# Altium PCB Weerstation.PcbDoc
Units mm, origin at the board's own origin, x right, y up, seen from the top; angles counter-clockwise.
Board outline 80 x 80 mm, 2 copper layers (Top Layer, Bottom Layer); 50 components, 49 nets, 214 pads, 112 vias.
Unrouted connection lines stored in the file: 2.
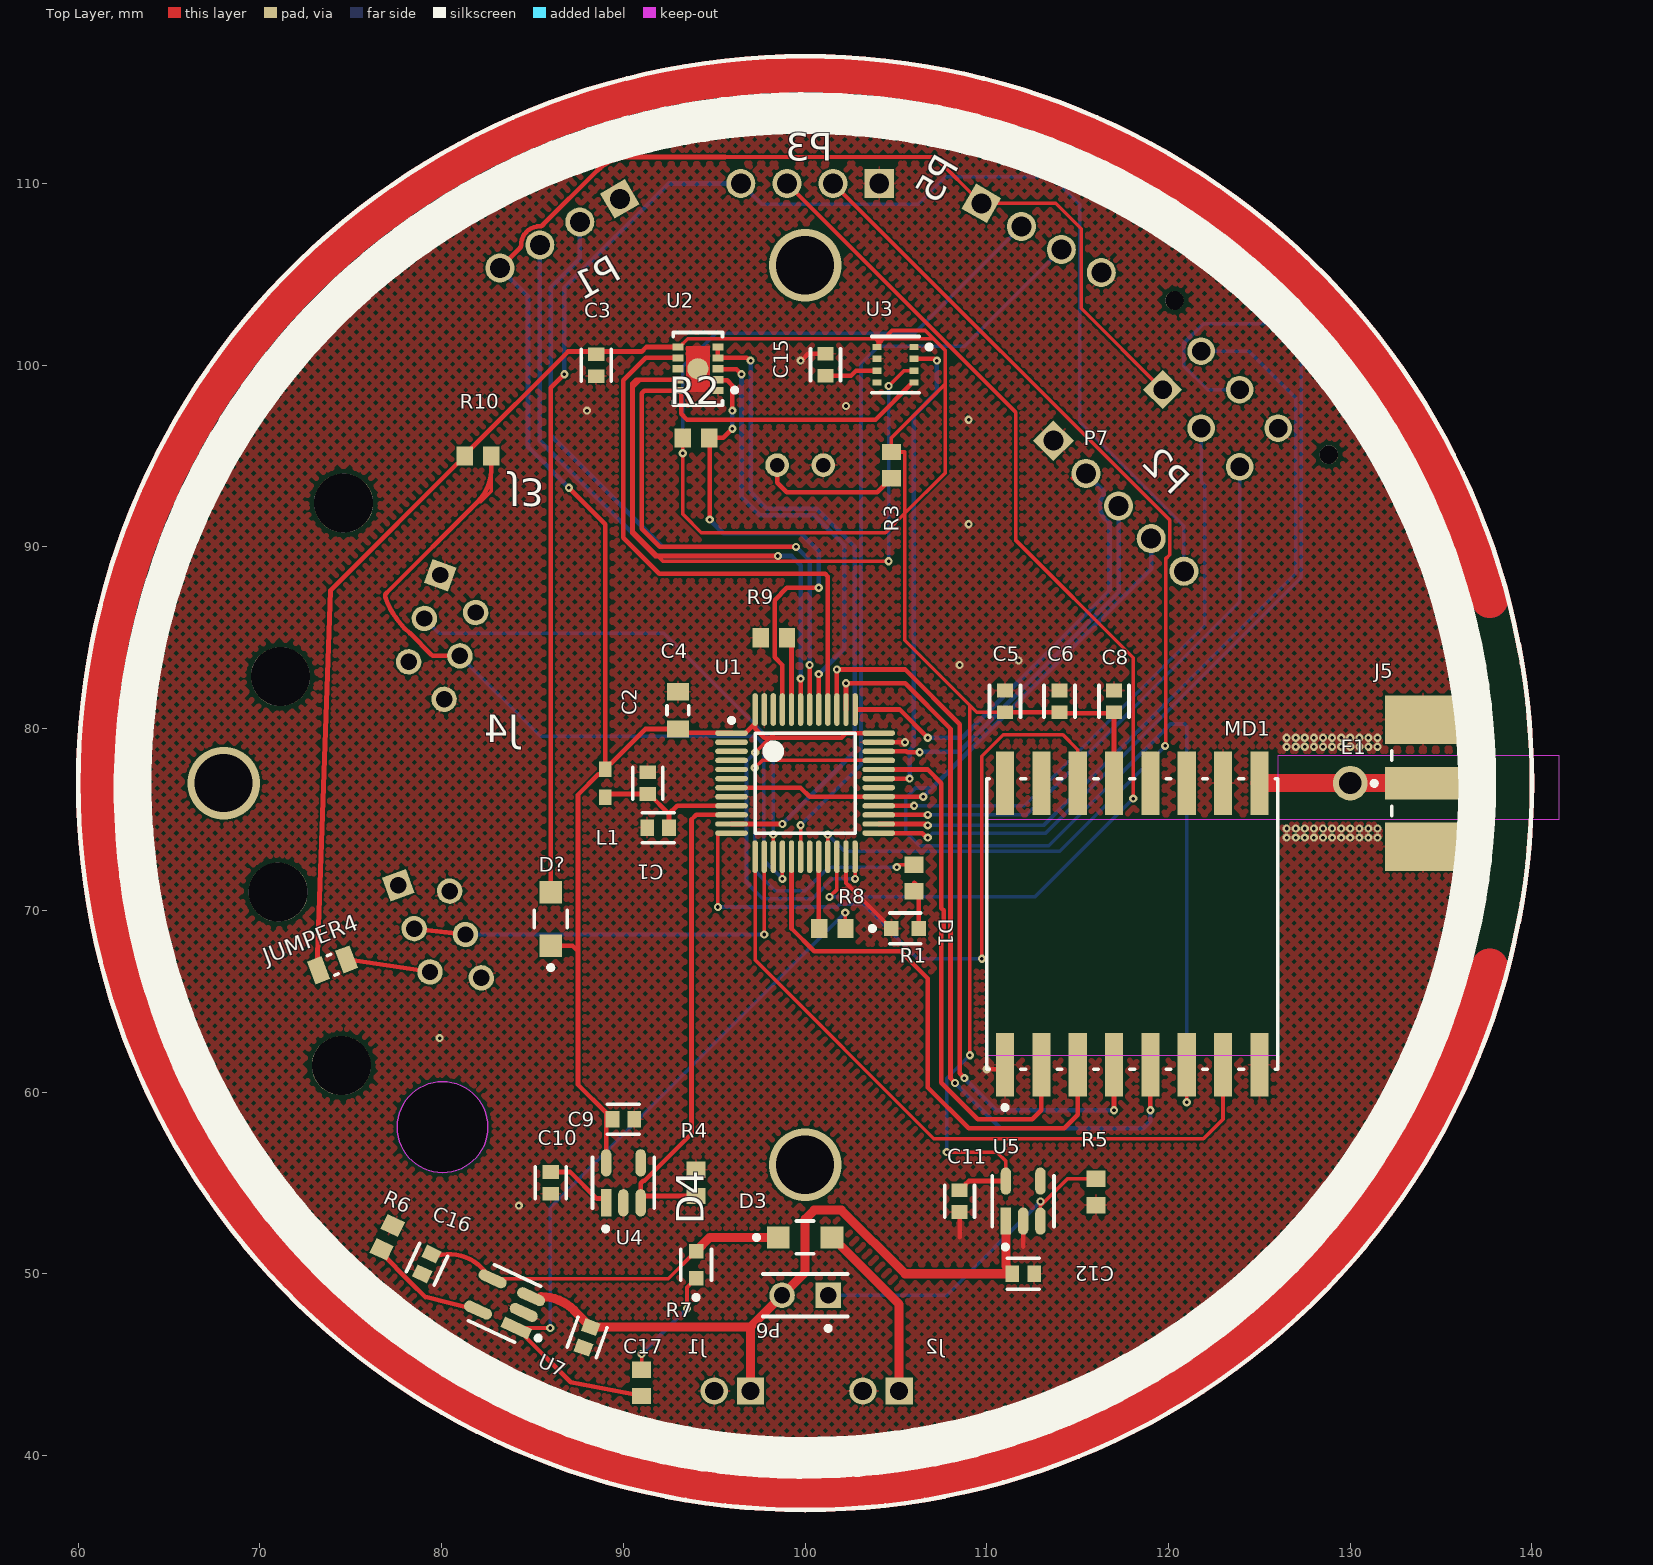
[diagram p0: Top Layer view]
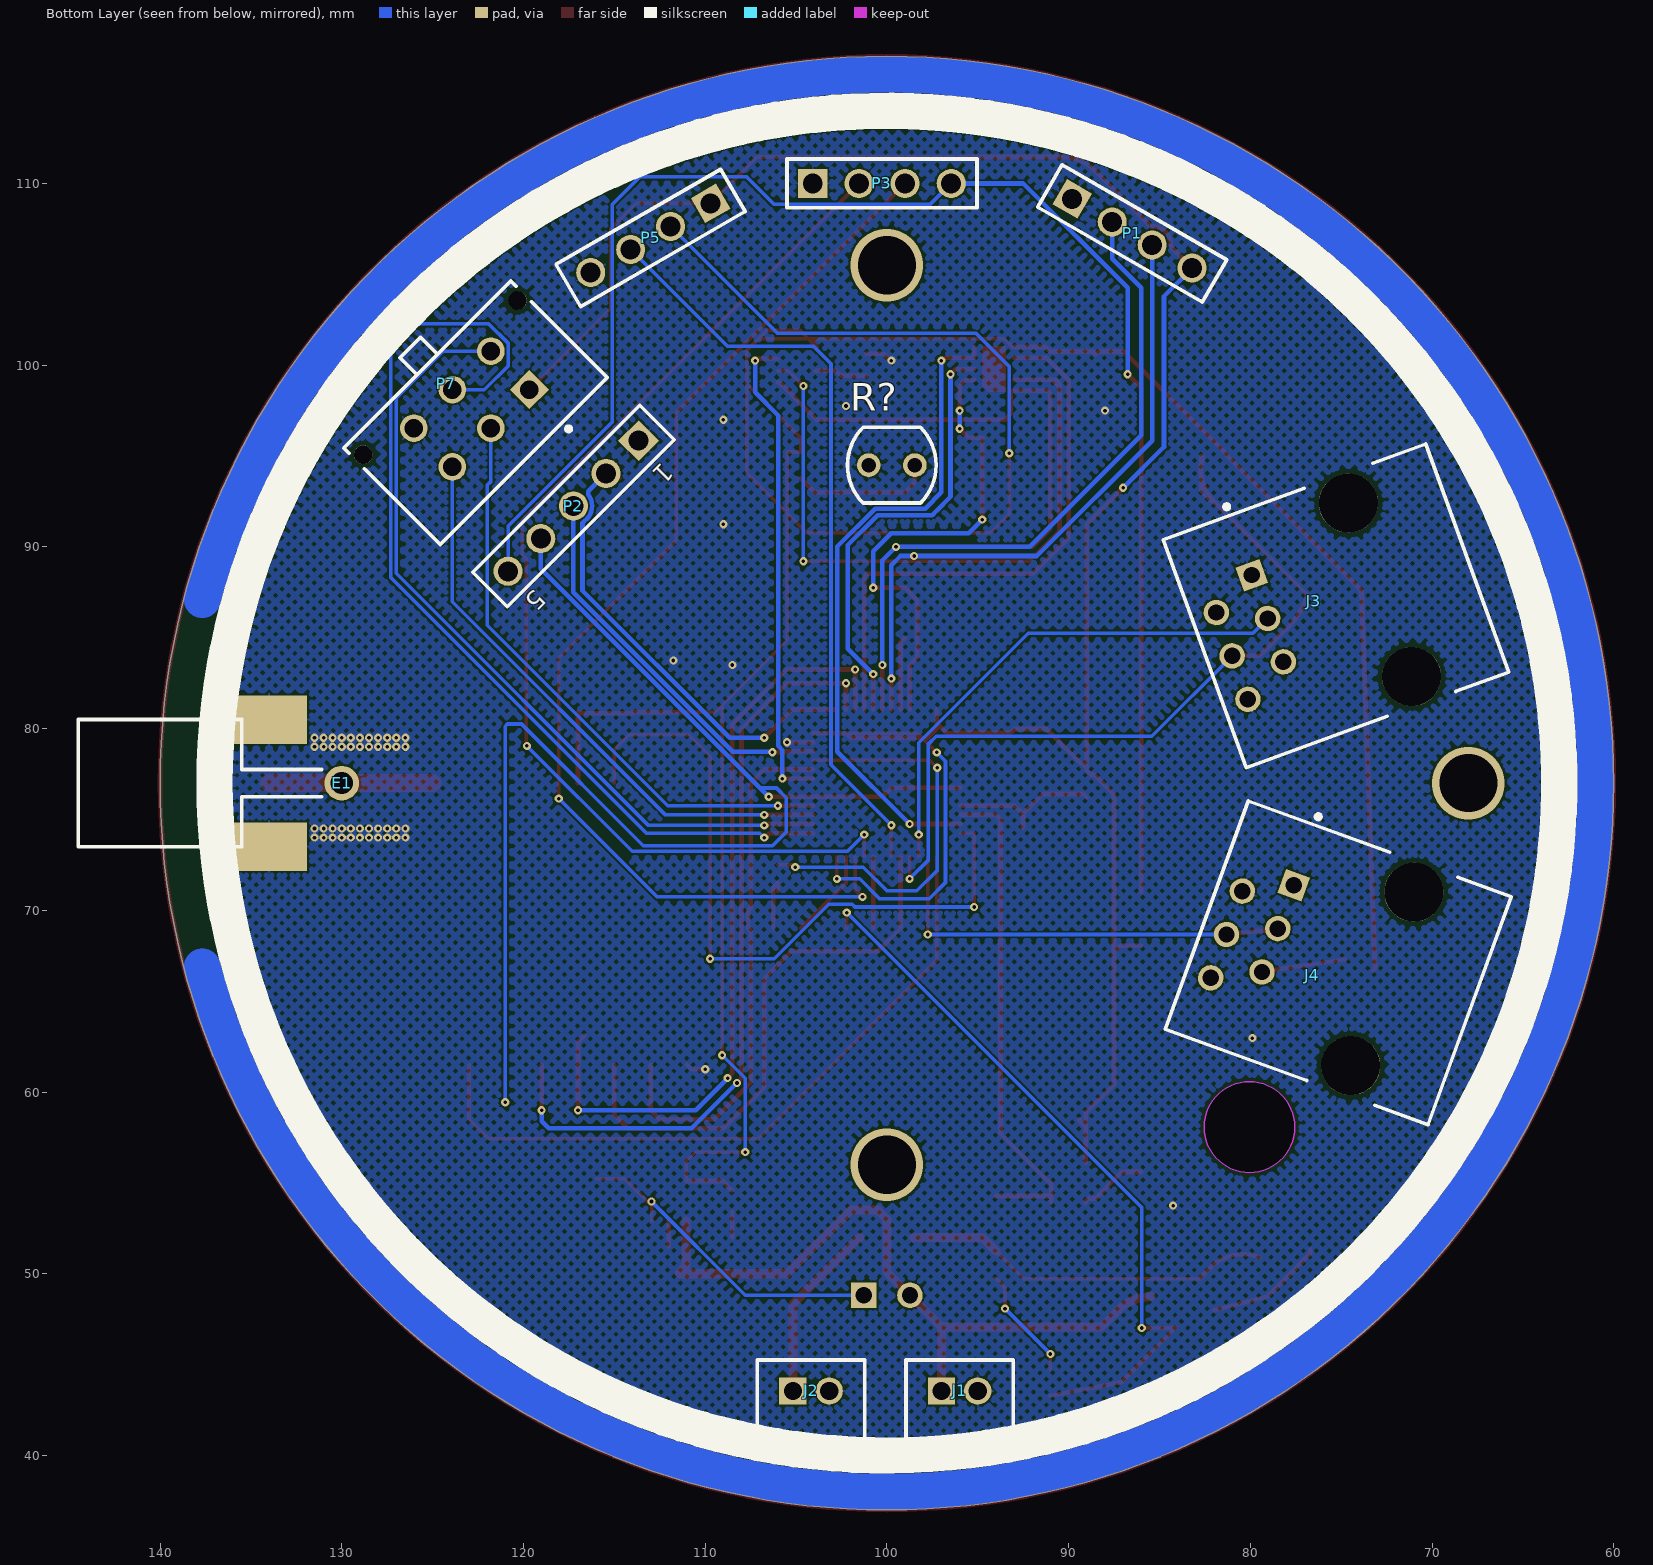
[diagram p1: Bottom Layer view, seen from below]
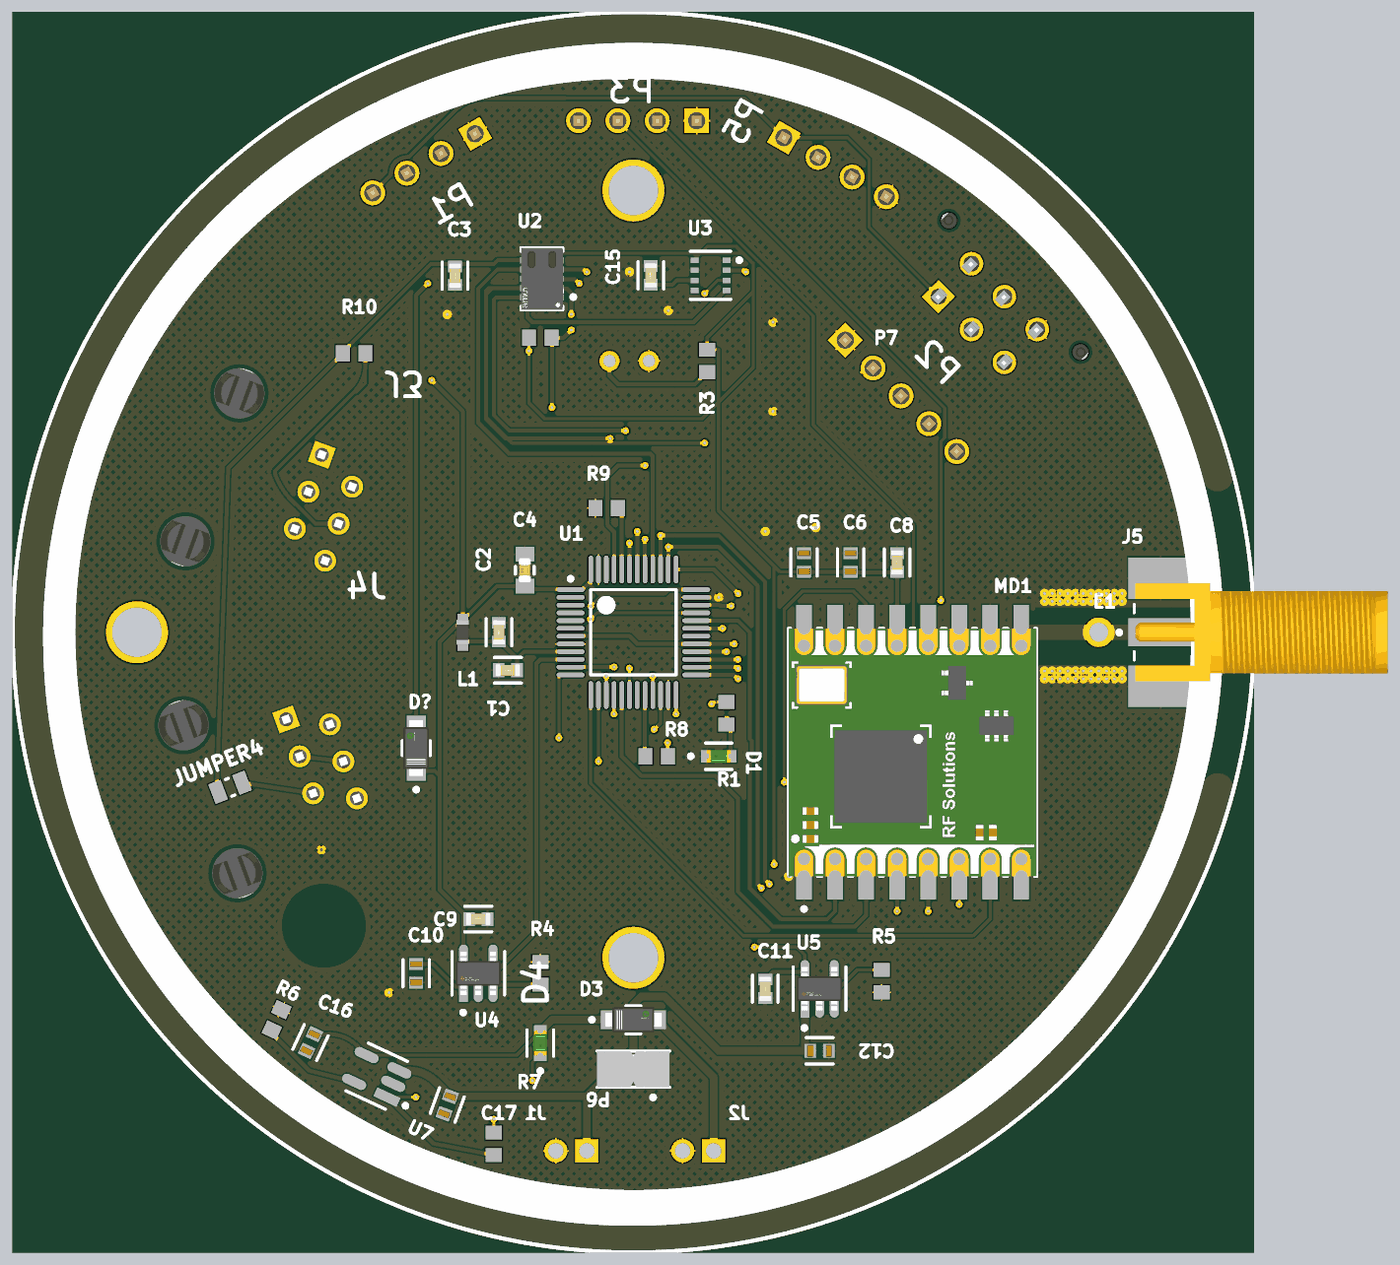
[diagram p2: 3D render of the assembled board from above, using the file's embedded part models]
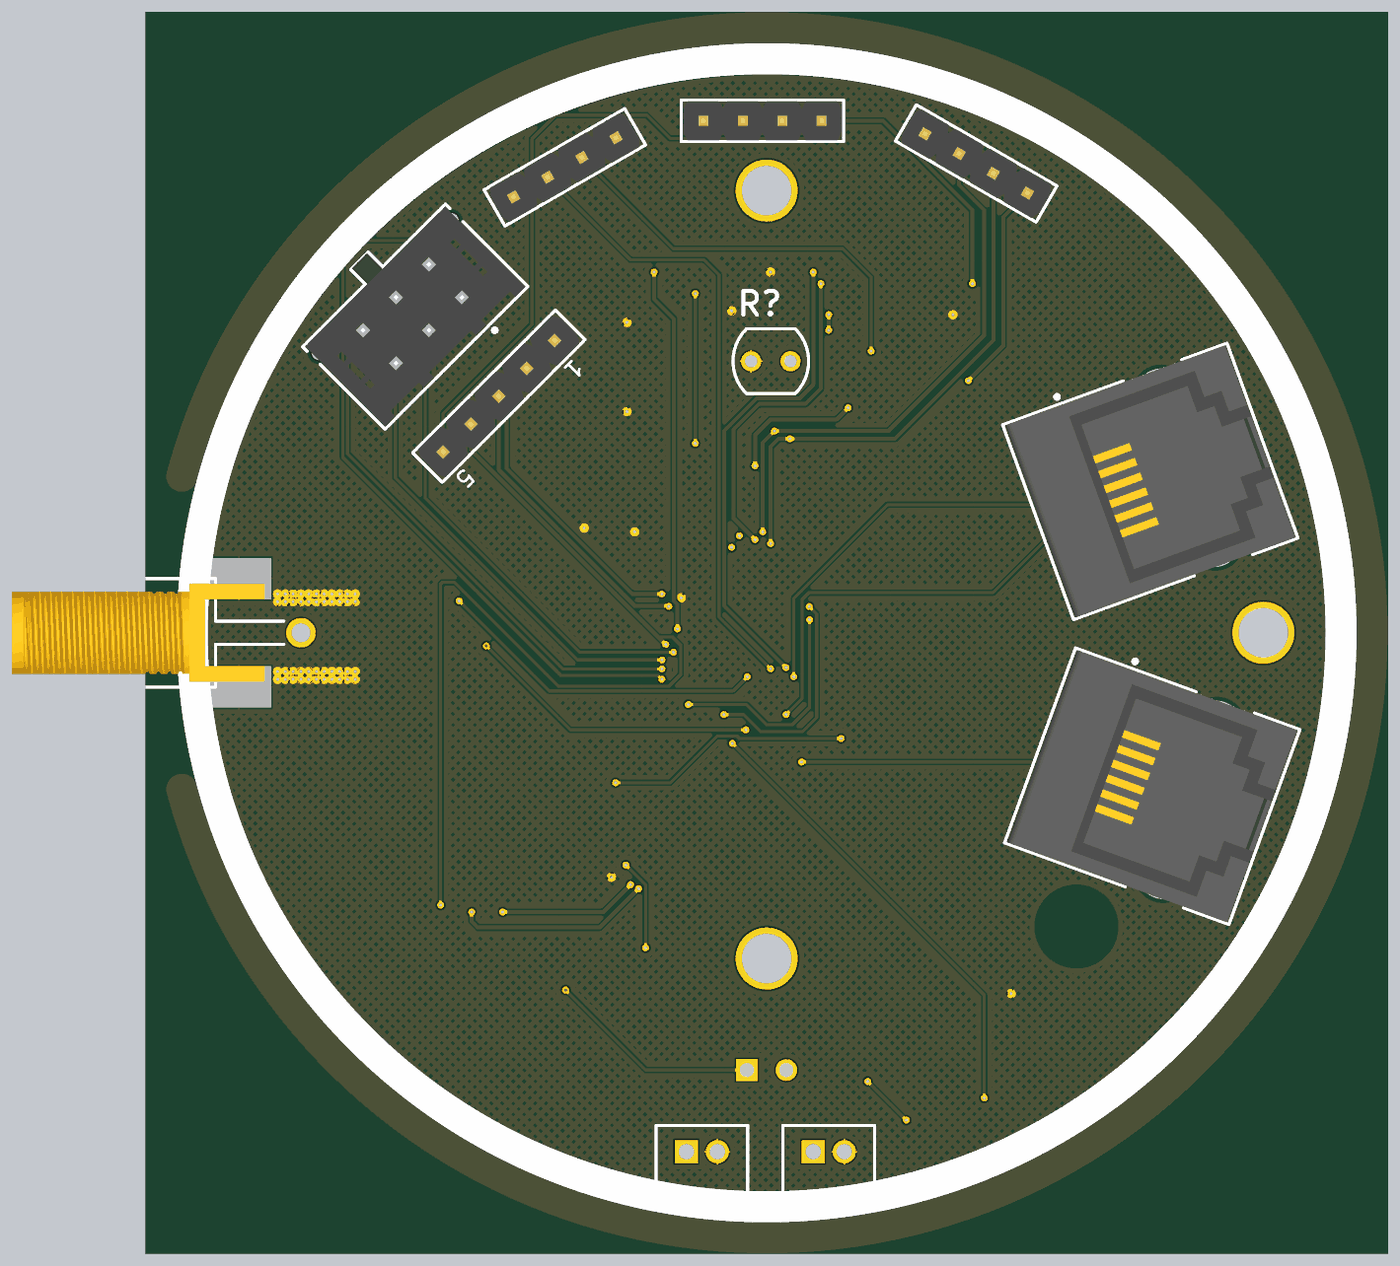
[diagram p3: 3D render of the assembled board from below, using the file's embedded part models]

## Layer stack, top to bottom
Top Solder: solder mask 0.0102, Solder Resist, Dk 3.5
Top Layer: signal copper 0.0356
Dielectric 1: dielectric 0.32, FR-4, Dk 4.8
Bottom Layer: signal copper 0.0356
Bottom Solder: solder mask 0.0102, Solder Resist, Dk 3.5

## Board outline
60,77 ccw(c100,77) 100,37 ccw(c100,77) 140,77 ccw(c100,77) 100,117 ccw(c100,77)
cut-out: 77.546,58.068 cw(c80.046,58.068) 80.046,60.568 cw(c80.046,58.068) 82.546,58.068 cw(c80.046,58.068) 80.046,55.568 cw(c80.046,58.068)
cut-out: 77.546,58.068 ccw(c80.046,58.068) 80.046,55.568 ccw(c80.046,58.068) 82.546,58.068 ccw(c80.046,58.068) 80.046,60.568 ccw(c80.046,58.068)

## Design rules (kind name [scope] priority, off if disabled: settings)
BoardOutlineClearance [All] p1: gap=0.2 ignorepadtopadclearanceinfootprint=FALSE
Clearance [All] p1: gap=0.102 ignorepadtopadclearanceinfootprint=FALSE except(0.127: Arc-Via Track-Via SMDPad-Via THPad-Via Via-Via Via-Fill Via-Poly Via-Region Via-Text; 0.25: Arc-Hole Track-Hole SMDPad-Hole THPad-Hole Via-Hole Fill-Hole Poly-Hole Region-Hole Text-Hole)
ComponentClearance [All] p1: gap=0.102 collisioncheckmode=3 verticalgap=0.102 showdistances=TRUE
DiffPairsRouting [All] p1: maxlimit=0.102 minlimit=0.102 mostfreqgap=0.102 toplayer_minwidth=0.102 toplayer_maxwidth=1816.048 toplayer_prefwidth=0.102 bottomlayer_minwidth=0.102 bottomlayer_maxwidth=1816.048 bottomlayer_prefwidth=0.102 maxuncoupledlength=12.7
Height [All] p1: minheight=0 maxheight=1816.048 prefheight=12.7
HoleSize [All] p1: absolutevalues=TRUE maxlimit=6.3 minlimit=0.2 maxpercent=80.000 minpercent=20.000
HoleToHoleClearance [All] p1: gap=0.25 allowstackedmicrovias=FALSE
MinimumAnnularRing [All] p1: minimumring=0.076
MinimumSolderMaskSliver [All] p1: minsoldermaskwidth=0
PlaneClearance [All] p1: clearance=0.102
PlaneConnect PlaneConnectPowerPads [InPadClass('PowerPads')] p1: planeconnectstyle=Direct reliefexpansion=0.508 reliefentries=4 reliefconductorwidth=0.254 reliefairgap=0.254
PlaneConnect [All] p2: pad.planeconnectstyle=Relief pad.reliefexpansion=0.3 pad.reliefentries=4 pad.reliefconductorwidth=0.102 pad.reliefairgap=0.102 via.planeconnectstyle=Direct via.reliefexpansion=0.3 via.reliefentries=4 via.reliefconductorwidth=0.127 via.reliefairgap=0.127
PolygonConnect PolygonConnectPowerPads [All vs (InPadClass('PowerPads'))] p1: connectstyle=Direct reliefconductorwidth=0.254 reliefentries=4 polygonreliefangle="90 Angle" airgapwidth=0.254
PolygonConnect [All] p2: thpad.connectstyle=Relief thpad.reliefconductorwidth=0.102 thpad.reliefentries=4 thpad.polygonreliefangle="90 Angle" thpad.airgapwidth=0.102 smdpad.connectstyle=Relief smdpad.reliefconductorwidth=0.102 smdpad.reliefentries=4 smdpad.polygonreliefangle="90 Angle" smdpad.airgapwidth=0.102 via.connectstyle=Direct via.reliefconductorwidth=0.127 via.reliefentries=4 via.polygonreliefangle="90 Angle" via.airgapwidth=0.127
RoutingVias [All] p1: holewidth=0.2 width=0.45 viastyle="Through Hole" minholewidth=0.2 minwidth=0.45 maxholewidth=6.3 maxwidth=6.55
SilkToSilkClearance [All] p1: silktosilkclearance=0
SilkToSolderMaskClearance [IsPad] p1: minsilkscreentomaskgap=0.102 clearancetoexposedcopper=TRUE
SolderMaskExpansion [All] p1: expansion=0.075
Width [All] p1: maxlimit=0.254 minlimit=0.102 preferedwidth=0.2 minimp=50.000000 maximp=50.000000 favimp=50.000000
20 further rules are at their usual default settings.

## Components (designator, comment, footprint, x,y, rotation, side; value= is the part's Value field where it differs from the comment)
C1 "100nF" FP-C0603C105K3PACTU-MFG 91.907,74.55 r180 top
C2 "100nF" FP-C0603C105K3PACTU-MFG 91.335,77 r90 top
C3 "100nF" FP-C0603C105K3PACTU-MFG 88.5,100 r270 top
C4 "100nF" FP-CGA3E-0_3-0_1-IPC_A 93,81 r90 top
C5 "4.7uF" FP-C0603-CG-MFG 111,81.5 r90 top
C6 "4.7uF" FP-C0603-CG-MFG 114,81.5 r90 top
C8 "100nF" FP-C0603C105K3PACTU-MFG 117,81.5 r90 top
C9 "1uF" FP-C0603C105K3PACTU-MFG 90,58.5 r0 top
C10 "1uF" FP-C0603-CG-MFG 86,55 r270 top value=4.7uF
C11 "1uF" FP-C0603C105K3PACTU-MFG 108.5,54 r270 top
C12 "1uF" FP-C0603-CG-MFG 112,50 r0 top value=4.7uF
C15 "100nF" FP-C0603C105K3PACTU-MFG 101.125,100.025 r90 top
C16 "4.7uF" FP-C0603-CG-MFG 79.186,50.535 r245 top
C17 "4.7uF" FP-C0603-CG-MFG 88,46.5 r250 top
D1 "Green LED" FP-LTST-C190GKT-MFG 105.5,69 r0 top
D3 "MBR120VLSFT3G" FP-498-MFG 100,52 r0 top
D4 "Green LED" FP-LTST-C190GKT-MFG 94,50.5 r90 top
D? "MBR120VLSFT3G" FP-498-MFG 86,69.525 r90 top
E1 "ANT-868-JJB-RA" ANT-XXX-JJB-RA 130,77 r90 bottom
J1 "B2B-PH-K-S(LF)(SN)" JST-B2B-PH-K-S_V 96,43 r180 bottom
J2 "B2B-PH-K-S(LF)(SN)" JST-B2B-PH-K-S_V 104.174,43 r180 bottom
J3 "95503-2661" FP-95503-2661-MFG 75.288,86.755 r70 bottom
J4 "95503-2661" FP-95503-2661-MFG 75.162,67.109 r110 bottom
J5 "73251-2120" FP-73251-2120-MFG 140.415,77 r180 top
JUMPER4 "JUMPER" RESC2013X50X30LL20T20 74,67 r201 top
L1 "Ferrite Bead" SMD-0603 89,77 r90 top
MD1 "RFM95W-868S2" FP-RFM95W-868S2-MFG 118,69.25 r90 top
P1 "61300411121" 61300411121 86.5,107.25 r210 bottom
P2 "61300511121" 61300511121 117.25,92.25 r315 bottom
P3 "61300411121" 61300411121 100.27,110 r180 bottom
P5 "61300411121" 61300411121 113,107 r330 bottom
P6 "5-146280-2" TECO-5-146280-2_V 100,48.814 r180 top
P7 "66200621122" 66200621122 122.64,97.379 r135 bottom
R1 "470R" RESC1608X55X30ML15T15 106,71.775 r270 top
R2 "4.7k" RESC1608X55X30ML15T15 94,96 r180 top
R3 "470R" RESC1608X55X30ML15T15 104.75,94.5 r270 top
R4 "10K" RESC1608X55X30ML15T15 94,55 r90 top
R5 "10K" RESC1608X55X30ML15T15 116,54.5 r270 top
R6 "10K" RESC1608X55X30ML15T15 77,52 r245 top
R7 "10K" RESC1608X55X30ML15T15 91,44 r90 top
R8 "10K" RESC1608X55X30ML15T15 101.5,69 r0 top
R9 "10K" RESC1608X55X30ML15T15 98.275,85 r180 top
R10 "100K" RESC1608X55X30ML15T15 82,95 r180 top
R? "VT90N1" EXCE-VT90N1 99.73,94.5 r180 bottom
U1 "STM32L051C8T6TR" STM-LQFP48_N 100,77 r0 top
U2 "CCS811B-JOPR5K" FP-CCS811B-JOPR5K-MFG 94.1,99.8 r180 top
U3 "BME280" FP-BME280-MFG 104.975,100.025 r0 top
U4 "TPS7A0233PDBVR" FP-DBV0005A-IPC_B 90,55 r90 top
U5 "TPS7A0233PDBVR" FP-DBV0005A-IPC_B 112,54 r90 top
U7 "MCP73831T-2ACI/OT" FP-C04-091-OT-IPC_A 83.458,48.368 r155 top

## Footprints (in the part's own frame and the unit in brackets; to place one, negate y for a bottom-side part, rotate by r counter-clockwise, add the part's x,y. Pads: shape width x height; smd on the part's side, far side on the other; paste and mask are expansions set on the pad)
61300411121 [mm] "Pin Header, pitch 2.54 mm, THT, Vertical, single row, 4p"
  rect 1.6x1.6 hole 1.1: 1(-3.81,0)
  round 1.6 hole 1.1: 2(-1.27,0) 3(1.27,0) 4(3.81,0)
  silkscreen extent -5.23,-1.35 5.23,1.35, body extent -5.08,-1.27 5.08,1.27, height 8.57
61300511121 [mm] "Pin Header, pitch 2.54 mm, THT, Vertical, single row, 5p"
  rect 1.6x1.6 hole 1.1: 1(-5.08,0)
  round 1.6 hole 1.1: 2(-2.54,0) 3(0,0) 4(2.54,0) 5(5.08,0)
  silkscreen extent -6.5,-1.35 6.5,1.34, body extent -6.35,-1.27 6.35,1.27, height 8.57
66200621122 [mm] "Dual row Vertical header 06p"
  rect 1.52x1.52 hole 1.02: 1(3,-1.2)
  round 1.52 hole 1.02: 2(0,-1.2) 3(-3,-1.2) 4(3,1.8) 5(0,1.8) 6(-3,1.8)
  round 1.02 hole 1.02 unplated: MH1(-6,2.74) MH2(6,2.74)
  silkscreen extent -6.5,-4.37 6.5,5.08, body extent -6.35,-3.68 6.35,5.08, height 9.93
ANT-XXX-JJB-RA [mil] "Antenna, 1-Lead, Thru-Hole, Right-Angle, Body 7.0x9.0mm (Dia.xH typ)"
  round 75 hole 48: 1(0,0)
  silkscreen extent -138,43 138,571, body extent -138,-29 137,571, height 275
EXCE-VT90N1 [mm] "THD, 2-Leads, Body Width 4.17mm (Max), Height 2.29mm"
  round 1.3 hole 0.8: 1(-1.27,0) 2(1.27,0)
  silkscreen extent -2.44,-2.08 2.44,2.09, body extent -2.44,-2.09 2.44,2.09, height 2.29
FP-498-MFG [mm]
  rect 1.25x1.22 smd paste+0 mask+0: 1(-1.475,0) 2(1.475,0)
  silkscreen extent -2.8,-0.9 0.47,0.9, body extent -2.2,-1 2.2,1, height 0.25
FP-73251-2120-MFG [mm]
  rect 4.19x1.78 smd paste+0 mask+0: 1(6.415,0)
  rect 4.19x2.665 smd paste+0 mask+0: 2(6.415,3.493) 3(6.415,-3.492)
  rect 4.19x2.665 smd far side paste+0 mask+0: 4(6.415,3.493) 5(6.415,-3.492)
  silkscreen extent 8.13,-1.79 9.22,1.79, body extent -8.23,-4.92 8.61,4.92, height 0.25
FP-95503-2661-MFG [mm]
  rect 1.4x1.4 hole 0.9 paste-1000 mask+0: 1(3.175,3.77)
  round 1.4 hole 0.9 paste-1000 mask+0: 2(1.905,6.31) 3(0.635,3.77) 4(-0.635,6.31) 5(-1.905,3.77) 6(-3.175,6.31)
  round 3.25 hole 3.25 unplated paste-1000 mask+0: ""(-5.08,-2.58) ""(5.08,-2.58)
  silkscreen extent -6.68,-7.69 7.3,7.69, body extent -6.61,-7.54 6.61,7.54, height 15.85
FP-BME280-MFG [mm]
  rect 0.5x0.35 smd paste+0 mask+0: 1(1.025,0.975) 2(1.025,0.325) 3(1.025,-0.325) 4(1.025,-0.975) 5(-1.025,-0.975) 6(-1.025,-0.325) 7(-1.025,0.325) 8(-1.025,0.975)
  silkscreen extent -1.3,-1.55 1.97,1.55
FP-C04-091-OT-IPC_A [mil]
  rect 64.5x24.33 smd paste+0 mask+0: 1(-45.91,37.4)
  rrect100% 64.5x24.33 smd paste+0 mask+0: 2(-45.91,0) 3(-45.91,-37.4) 4(45.91,-37.4) 5(45.91,37.4)
  silkscreen extent -103,-67 55,67
FP-C0603-CG-MFG [mm]
  rect 0.75x0.9 smd paste+0 mask+0: 1(-0.6,0) 2(0.6,0)
  silkscreen extent -0.88,-0.85 0.87,0.85, body extent -1.2,-0.6 1.2,0.6, height 0.25
FP-C0603C105K3PACTU-MFG [mm]
  rect 0.75x0.9 smd paste+0 mask+0: 1(-0.6,0) 2(0.6,0)
  silkscreen extent -0.87,-0.82 0.88,0.83, body extent -1.2,-0.6 1.2,0.6, height 0.25
FP-CCS811B-JOPR5K-MFG [mm]
  rect 0.6x0.4 smd paste+0 mask+0: 1(-1.1,1.2) 2(-1.1,0.6) 3(-1.1,0) 4(-1.1,-0.6) 5(-1.1,-1.2) 6(1.1,-1.2) 7(1.1,-0.6) 8(1.1,0) 9(1.1,0.6) 10(1.1,1.2)
  round 1.17 smd paste+0 mask+0: 11(0,0)
  Top Layer region: -0.65,0.95 -0.65,-1.25 0.65,-1.25 0.65,1.25 -0.35,1.25
  silkscreen extent -2.15,-2 1.35,2, body extent -1.9,-2.5 1.9,2.5, height 0.25
FP-CGA3E-0_3-0_1-IPC_A [mm]
  rect 0.956x1.206 smd paste+0 mask+0: 1(-1.025,0) 2(1.025,0)
  silkscreen extent -0.25,-0.6 0.25,0.6, body extent -2,-1.1 2,1.1, height 0.25
FP-DBV0005A-IPC_B [mm]
  rect 1.505x0.572 smd paste+0 mask+0: 1(-1.1,0.95)
  rrect100% 1.505x0.572 smd paste+0 mask+0: 2(-1.1,0) 3(-1.1,-0.95) 4(1.1,-0.95) 5(1.1,0.95)
  silkscreen extent -2.65,-1.7 1.4,1.7, body extent -2.1,-1.7 2.1,1.7, height 0.25
FP-LTST-C190GKT-MFG [mm]
  rect 0.8x0.8 smd paste+0 mask+0: 1(-0.75,0) 2(0.75,0)
  silkscreen extent -1.92,-0.85 0.85,0.85, body extent -1.25,-0.55 1.25,0.55, height 0.25
FP-RFM95W-868S2-MFG [mm]
  rect 3.5x1 smd paste+0 mask+0: 1(-7.75,7) 2(-7.75,5) 3(-7.75,3) 4(-7.75,1) 5(-7.75,-1) 6(-7.75,-3) 7(-7.75,-5) 8(-7.75,-7) 9(7.75,-7) 10(7.75,-5) 11(7.75,-3) 12(7.75,-1) 13(7.75,1) 14(7.75,3) 15(7.75,5) 16(7.75,7)
  silkscreen extent -10.22,-8 8,8, body extent -9.6,-8.1 9.6,8.1, height 0.25
JST-B2B-PH-K-S_V [mm] "Connector, 2-Leads, Body 5.9x4.5mm, Pitch 2mm"
  rect 1.5x1.5 hole 1: 1(-1,0.55)
  round 1.5 hole 1: 2(1,0.55)
  silkscreen extent -2.95,-2.25 2.95,2.25, body extent -2.95,-2.25 2.95,2.25, height 6
RESC1608X55X30ML15T15 [mm] "Chip Resistor, 2-Leads, Body 1.75x0.95mm, IPC Low Density"
  rect 0.9x1.05 smd: 1(-0.725,0) 2(0.725,0)
  body extent -0.87,-0.48 0.87,0.48, height 0.55
RESC2013X50X30LL20T20 [mm] "Chip Resistor, 2-Leads, Body 2.00x1.25mm, IPC High Density"
  rect 0.85x1.35 smd: 1(-0.825,0) 2(0.825,0)
  silkscreen extent -0.1,-0.57 0.1,0.58, body extent -1.1,-0.73 1.1,0.73, height 0.5
SMD-0603 [mm] "Chip Inductor, 2-Leads, Body 1.6x0.8mm"
  rect 0.85x0.7 smd: 1(-0.775,0) 2(0.775,0)
  body extent -0.8,-0.4 0.8,0.4, height 0.79
STM-LQFP48_N [mm] "QFP, 48-Leads, Body 7x7mm, Pitch 0.5mm, IPC Medium Density"
  oval 1.8x0.3 smd: 1(-4.05,2.75) 2(-4.05,2.25) 3(-4.05,1.75) 4(-4.05,1.25) 5(-4.05,0.75) 6(-4.05,0.25) 7(-4.05,-0.25) 8(-4.05,-0.75) 9(-4.05,-1.25) 10(-4.05,-1.75) 11(-4.05,-2.25) 12(-4.05,-2.75) 25(4.05,-2.75) 26(4.05,-2.25) 27(4.05,-1.75) 28(4.05,-1.25) 29(4.05,-0.75) 30(4.05,-0.25) 31(4.05,0.25) 32(4.05,0.75) 33(4.05,1.25) 34(4.05,1.75) 35(4.05,2.25) 36(4.05,2.75)
  oval 0.3x1.8 smd: 13(-2.75,-4.05) 14(-2.25,-4.05) 15(-1.75,-4.05) 16(-1.25,-4.05) 17(-0.75,-4.05) 18(-0.25,-4.05) 19(0.25,-4.05) 20(0.75,-4.05) 21(1.25,-4.05) 22(1.75,-4.05) 23(2.25,-4.05) 24(2.75,-4.05) 37(2.75,4.05) 38(2.25,4.05) 39(1.75,4.05) 40(1.25,4.05) 41(0.75,4.05) 42(0.25,4.05) 43(-0.25,4.05) 44(-0.75,4.05) 45(-1.25,4.05) 46(-1.75,4.05) 47(-2.25,4.05) 48(-2.75,4.05)
  silkscreen extent -4.17,-2.75 2.75,3.57, body extent -3.5,-3.5 3.5,3.5, height 1.6
TECO-5-146280-2_V [mm] "Connector, 2-Leads, Body 4.67x2.34mm, Pitch 2.54mm"
  rect 1.4x1.4 hole 0.89: 1(-1.27,0)
  round 1.4 hole 0.89: 2(1.27,0)
  silkscreen extent -2.34,-1.17 2.34,1.94, body extent -2.34,-1.17 2.34,1.17, height 5.33

## Part data
C1 C2 C3 C8 C15: library part CMP-2006-02216-3, "CAP CER 100nF 25V X5R 0603", Capacitance=1uF, Case Code (Imperial)=0603, Case Code (Metric)=1608, Dielectric=X5R, Dielectric Material=Ceramic, Max Operating Temperature=85°C, Min Operating Temperature=-55°C, Package Quantity=4000, Tolerance=10%, Voltage=25V, Case/Package=0603, Construction=Flat, Contact Plating=Tin, Depth=0.8mm, Height=0.8mm, Lead Free="Lead Free", Length=1.6mm, Mount="Surface Mount", Number of Pins=2, Packaging="Tape and Reel", Radiation Hardening=No, REACH SVHC="No SVHC", RoHS Compliant=Yes, Series=C0603C, Termination=SMD/SMT, Thickness=0.034inch, Voltage Rating=25V, Voltage Rating (DC)=25V, Width=0.031inch
C4: library part CMP-2000-07546-2, "Cap Ceramic 100nF 50V X7R 10% Pad SMD 0603 +125°C Automotive T/R", Case Code (Imperial)=0603, Case Code (Metric)=1608, Dielectric=X7R, Max Operating Temperature=125°C, Min Operating Temperature=-55°C, Package Quantity=1, Ratings=AEC-Q200, Tolerance=10%, Voltage=50V, Capacitance=100nF, Case/Package=0603, Composition=Ceramic, Depth=0.8mm, Height=0.8mm, Lead Free="Lead Free", Length=1.6mm, Mount="Surface Mount", Packaging="Tape and Reel", Radiation Hardening=No, REACH SVHC="No SVHC", Termination=SMD/SMT, Thickness=0.035inch, Voltage Rating=50V, Voltage Rating (DC)=50V, Weight=7.1E-05oz, Width=0.8mm
C5 C6 C16 C17: library part CMP-2006-02256-2, "CAP CER 4.7UF 6.3V X5R 0603", Manufacturer=Kemet, Manufacturer Part Number=C0603C475K9PACTU, Package=C0603-CG, Temperature="-55°C to +85°C", Temperature Characteristic=X5R, Temperature Coefficient=15%, Temperature Range High=+85°C, Temperature Range Low=-55°C, Tolerance=10%, Voltage Rating=6.3V, Automotive=No, Capacitance=4.7uF, Category=Cap, ComponentLink2Description=Datasheet, ComponentLink2URL=https://content.kemet.com/datasheets/KEM_C1006_X5R_SMD.pdf, Device Class L1="Passive Components", Device Class L2=Capacitors, Device Class L3="Ceramic Capacitors", Digikey Description="CAP CER 4.7UF 6.3V X5R 0603", Height=0.9mm, Ipc Land Pattern Name=CAPC16080X80, Lead Free=Yes, Material=Ceramic, Mouser Description="Multilayer Ceramic Capacitors MLCC - SMD/SMT 6.3volts 4.7uF X5R 10%", Octopart=https://octopart.com/c0603c475k9pactu-kemet-104242, RoHS=TRUE
C9 C11: library part CMP-2006-02216-3, "CAP CER 1UF 25V X5R 0603", Case Code (Imperial)=0603, Case Code (Metric)=1608, Dielectric=X5R, Dielectric Material=Ceramic, Max Operating Temperature=85°C, Min Operating Temperature=-55°C, Package Quantity=4000, Tolerance=10%, Voltage=25V, Capacitance=1uF, Case/Package=0603, Construction=Flat, Contact Plating=Tin, Depth=0.8mm, Height=0.8mm, Lead Free="Lead Free", Length=1.6mm, Mount="Surface Mount", Number of Pins=2, Packaging="Tape and Reel", Radiation Hardening=No, REACH SVHC="No SVHC", RoHS Compliant=Yes, Series=C0603C, Termination=SMD/SMT, Thickness=0.034inch, Voltage Rating=25V, Voltage Rating (DC)=25V, Width=0.031inch
C10 C12: library part CMP-2006-02256-2, "CAP CER 4.7UF 6.3V X5R 0603", Capacitance=4.7uF, Manufacturer=Kemet, Manufacturer Part Number=C0603C475K9PACTU, Package=C0603-CG, Temperature="-55°C to +85°C", Temperature Characteristic=X5R, Temperature Coefficient=15%, Temperature Range High=+85°C, Temperature Range Low=-55°C, Tolerance=10%, Voltage Rating=6.3V, Automotive=No, Category=Cap, ComponentLink2Description=Datasheet, ComponentLink2URL=https://content.kemet.com/datasheets/KEM_C1006_X5R_SMD.pdf, Device Class L1="Passive Components", Device Class L2=Capacitors, Device Class L3="Ceramic Capacitors", Digikey Description="CAP CER 4.7UF 6.3V X5R 0603", Height=0.9mm, Ipc Land Pattern Name=CAPC16080X80, Lead Free=Yes, Material=Ceramic, Mouser Description="Multilayer Ceramic Capacitors MLCC - SMD/SMT 6.3volts 4.7uF X5R 10%", Octopart=https://octopart.com/c0603c475k9pactu-kemet-104242, RoHS=TRUE
D1 D4: library part CMP-22017-000005-2, "LED GREEN CLEAR CHIP SMD", Case Code (Imperial)=0603, Case Code (Metric)=1608, Color=Green, Forward Current=30mA, Forward Voltage=2.1V, Lens Color=Colorless, Max Operating Temperature=85°C, Min Operating Temperature=-55°C, Package Quantity=1, Power Dissipation=100mW, Reverse Voltage=5V, Test Current=10mA, Voltage=2V, Case/Package=0603, Depth=0.8mm, Dominant Wavelength=569nm, Height=0.8mm, Illumination Color=Green, Lead Free="Lead Free", Length=1.6mm, Lens Style=Clear, Lens Transparency=Clear, Luminous Intensity=6mcd, Mount="Surface Mount", Number of Elements=1, Number of LEDs=1, Number of Pins=2, Packaging="Tape and Reel", Power Rating=100mW, Radiation Hardening=No, Viewing Angle=130°, Wavelength=565nm, Width=0.8mm
D3 D?: library part CMP-1055-00447-2, "DIODE SCHOTTKY 20V 1A SOD123FL", Average Rectified Current=1A, Forward Voltage=340mV, Max Forward Surge Current (Ifsm)=45A, Max Operating Temperature=125°C, Max Repetitive Reverse Voltage (Vrrm)=20V, Max Reverse Leakage Current=600uA, Min Operating Temperature=-65°C, Package Quantity=10000, Current Rating=1A, Element Configuration=Single, Forward Current=1A, Halogen Free="Halogen Free", Lead Free="Lead Free", Max Reverse Voltage (DC)=20V, Max Surge Current=45A, Number of Pins=2, Output Current=1A, Packaging="Tape and Reel", Peak Non-Repetitive Surge Current=45A, Peak Reverse Current=600uA, Polarity=Standard, Radiation Hardening=No, REACH SVHC="No SVHC", Voltage Rating (DC)=20V
E1: library part CMP-0172-00026-1, "Embeddable 1/4-wave Monopole Antenna, JJB Series, 868MHz, 7mm Dia. Package, Right-Angle", DatasheetVersion=Jul-2008, Note1="No ground planes or traces under the antenna", PackageDescription="Antenna, Monopole, JJB Series, Thru-Hole, Right-Angle, 7.0 x 9.0 mm (Dia.xH typ)", PackageReference=ANT-XXX-JJB-RA, PackageVersion=Jul-2008
J1 J2: library part CMP-2000-05162-1, "Male Header, Pitch 2 mm, 1 x 2 Position, Height 6 mm, Tail Length 3.4 mm, -25 to 85 degC, RoHS, Bulk", Manufacturer=JST, Datasheet URL=http://datasheet.octopart.com/B2B-PH-K-S%28LF%29%28SN%29-JST-datasheet-8324864.pdf, Datasheet Version=Nov-08, Manufacturer URL=http://www.jst.com/home2.html, No of Positions=2, Pitch=2mm, Style/Orientation=StraightHeader/Plug, Termination=Crimp, Type=ShroudedHeader
J3 J4: library part CMP-04778-000008-1, "CONN MOD JACK 6P6C VERT UNSHLD", Color=Black, Current Rating=1.5A, Max Operating Temperature=80°C, Max Voltage Rating (DC)=125V, Min Operating Temperature=-40°C, Package Quantity=3094, Contact Material="Copper Alloy", Contact Plating=Gold, Depth=15.08mm, Gender=Female, Halogen Free="Low Halogen", Housing Color=Black, Housing Material=Thermoplastic, Length=13.21mm, Mount="Through Hole", Number of Contacts=6, Number of Ports=1, Number of Positions=6, Number of Positions Loaded=6, Number of Ways=6, Orientation=Straight, Packaging=Tray, Pitch=2.54mm, Series=95503, Shielding=Unshielded, Termination="Through Hole", Voltage Rating=125V, Voltage Rating (DC)=125V, Width=13.21mm
J5: library part CMP-04764-000015-1, "CONN SMA JACK STR 50OHM EDGE MNT", Case/Package=SMA, Operating Frequency=N/A, Package Quantity=1600, Body Material=Brass, Body Plating=Gold, Connector Type=SMA, Contact Material=Copper, Contact Plating=Gold, Gender=Female, Halogen Free="Low Halogen", Impedance=50R, Lead Free="Lead Free", Mount=Edge, Orientation=Straight, Packaging=Bulk, Plating=Gold, Polarity=Standard, Radiation Hardening=No, RoHS Compliant=Yes, Series=73251, Termination=Solder
JUMPER4: library part CMP-2001-04896-1, Manufacturer="Vishay Dale", Part Number=CRCW08050000Z0EA
L1: library part CMP-0220-00185-1, "SMD EMI Suppression Ferrite Bead WE-CBF, Z = 30 Ohm", ComponentLink1Description="Manufacturer Link", ComponentLink1URL=http://www.we-online.com, ComponentLink2Description=Datasheet, ComponentLink2URL=http://www.we-online.de/katalog/media/pdf/742792601.pdf, DatasheetVersion=Dec-2005, Impedance="30 Ohm", PackageDescription="Chip Inductor, 2-Leads, Body 1.6 x 0.8 mm", PackageReference=SMD-0603, PackageVersion=2009
MD1: library part CMP-204316-000001-1, "RX TXRX MODULE ISM < 1GHZ SMD", Case/Package=SMD/SMT, Current - Receiving=12.1mA, Current - Transmitting=120mA, Frequency=868MHz, Max Operating Temperature=70°C, Min Operating Temperature=-20°C, Data Rate=300Kbps, Interface=SPI, Mount="Surface Mount", Packaging=Bulk, Sensitivity=-123dBm
P1 P3 P5: library part CMP-1502-01064-1, "THT Vertical Pin Header WR-PHD, Pitch 2.54 mm, Single Row, 4 pins", Contact Resistance=20mOhm, Manufacturer="Wurth Elektronik", Operating Temperature=-40to105degC, Rated Current=3A, Withstanding Voltage=500VAC, Working Voltage=250VAC, Datasheet URL=https://katalog.we-online.de/em/datasheet/6130xx11121.pdf, Gender=Male, Manufacturer URL=http://www.we-online.de, Mounting Technology=THT, Orientation=Vertical, Package Reference=61300411121, Packaging=Bag, Part Number=61300411121, Pin Number=4, Pitch=2.54mm, Publisher=WurthElektronik, Row Number=Single
P2: library part CMP-1502-01068-1, "THT Vertical Pin Header WR-PHD, Pitch 2.54 mm, Single Row, 5 pins", Contact Resistance=20mOhm, Manufacturer="Wurth Elektronik", Operating Temperature=-40to105degC, Rated Current=3A, Withstanding Voltage=500VAC, Working Voltage=250VAC, Datasheet URL=https://katalog.we-online.de/em/datasheet/6130xx11121.pdf, Gender=Male, Manufacturer URL=http://www.we-online.de, Mounting Technology=THT, Orientation=Vertical, Package Reference=61300511121, Packaging=Bag, Part Number=61300511121, Pin Number=5, Pitch=2.54mm, Publisher=WurthElektronik, Row Number=Single
P6: library part CMP-2000-07492-1, "Male Header, Pitch 2.54 mm, 1 x 2 Position, Height 8.21 mm, Tail Length 3.05 mm, -65 to 105 degC, RoHS, Bulk", Case\/Package=100, Colour=Black, Current Rating=3A, Flammability Rating=UL94V-0, High Temperature Housing=Yes, Manufacturer="TE Connectivity", Max Current Rating=5A, Max Operating Temperature=105degC, Min Operating Temperature=-65degC, Package Description="Male Header, Pitch 2.54 mm, 1 x 2 Position, Height 8.21 mm, Tail Length 3.05 mm", Package Quantity=500, Approvals=CSA, Board Standoff=No(Without), Connector Type=Header, Contact Gender=Male, Contact Material=CopperAlloy, Contact Mating Length=0.23inch, Contact Plating=Matte, Contact Protection=No(Without), Contact Shape=Square, Datasheet URL=http://www.te.com/commerce/DocumentDelivery/DDEController?Action=showdoc&DocId=Customer+Drawing%7F146280%7FH1%7Fpdf%7FEnglish%7FENG_CD_146280_H1.pdf%7F5-146280-2, Datasheet Version="Rev. H1, 08/2016", Depth=2.34mm, Gasket=No(Without), High Speed Serial Data Connector=No, Housing Colour=Black, Housing Material=Polymer, Keyed=No, Length=4.67mm, Manufacturer URL=http://www.te.com/, Mating Alignment=No(Without), Mating Connector Lock=No(Without), Mating Post Length=0.23inch, Mount=ThroughHole, Mounting Technology=ThroughHole, Number of Contacts=2, Number of Positions=2, Number of Rows=1, Orientation=Straight, Package Reference=5-146280-2, Packaging=Carton, Panel Mount Retention=No(Without), PCB Mount Retention=Without, PCB Mounting Orientation=Vertical, PCB Thickness=0.063inch, Pitch=2.54mm, Radiation Hardening=No, RoHSCompliant=true, Row Spacing=2.54mm, Selectively Loaded=No(Without), Stabilizers=No(Without), Termination=ThroughHole, Termination Post Length=0.12inch
P7: library part CMP-1502-00310-1, "THT Male Header WR-MPC3, Vertical, Dual Row, pitch 3 mm, 6 pins", Contact Resistance=10mOhm, Manufacturer="Wurth Elektronik", Operating Temperature=-40to105degC, Working Voltage=250VAC, Datasheet URL=https://katalog.we-online.de/em/datasheet/6620xx21122.pdf, Gender=Male, Manufacturer URL=http://www.we-online.de, Mounting Technology=THT, Orientation=Vertical, Package Reference=66200621122, Packaging=Tube, Part Number=66200621122, Pin Number=6, Pitch=3mm, Publisher=WurthElektronik
R1 R3: library part CMP-1012-00473-6, "Chip Resistor, 470 Ohm, +/- 1%, 0.1 W, -55 to 155 degC, 0603 (1608 Metric), RoHS, Tape and Reel", Manufacturer=Panasonic, Max Operating Temperature="155 degC", Min Operating Temperature="-55 degC", Package Quantity=1, Voltage Rating="75 V", ComponentLink1Description="Manufacturer URL", ComponentLink1URL=http://www.panasonic.com/, ComponentLink2Description=Datasheet, ComponentLink2URL=http://industrial.panasonic.com/cdbs/www-data/pdf/RDA0000/AOA0000C86.pdf, ComponentLink3Description="Package Specification", ComponentLink3URL=https://datasheet.ciiva.com/11808/0900766b80f806dd-11808207.pdf, DatasheetVersion=04/2015, Height="0.45 mm", Length="1.6 mm", Mount="Surface Mount", Mounting Technology="Surface Mount", PackageDescription="2-Pin Surface Mount Device, Body 1.6 x 0.85 mm", PackageReference=0603, Packaging="Tape and Reel", Pins=2, REACH SVHC=Yes, RoHSCompliant=true
R2 R4 R5 R6 R7 R8 R9 R10: library part CMP-2000-00182-1, Manufacturer=Panasonic, Part Number=ERJ-3EKF1003V
R?: library part CMP-2000-07406-1, "Photoconductive Resistor, 200 kOhm, 100 V, 80 mW, -40 to 75 degC, 2-Pin THD, RoHS", Dark Resistance=200kohm, Manufacturer="Excelitas Technology", Operating Temperature Max=75°C, Operating Temperature Min=-40°C, Package Description="2-Pin Through Hole Device, Body Width 4.17 mm (Max), Height 2.29 mm", Power Rating=80mW, Resistance @ Lux=12kohm, Resistor Case Style=-, Voltage Rating=100V, Datasheet URL=http://datasheet.octopart.com/VT90N1-Excelitas-datasheet-10388451.pdf, Datasheet Version=09/2006, Manufacturer URL=http://www.excelitas.com/Pages/Index.aspx, Mounting Technology=ThroughHole, Package Reference=VT90N1, Packaging=Each, Product Range=-, SVHC=Cadmiumchloride(15-Jun-2015)
U1: library part CMP-1546-00004-1, "Ultra-Low-Power ARM Cortex-M0+ MCU, 64 KB Flash, 1.8 to 3.6 V, -40 to 85 degC, 48-Pin LQFP, RoHS, Tape and Reel", Temperature Max="85 degC", Temperature Min="-40 degC", ComponentLink1Description="Manufacturer URL", ComponentLink1URL=http://www.st.com/web/en/home.html, ComponentLink2Description=Datasheet, ComponentLink2URL=http://www.st.com/st-web-ui/static/active/en/resource/technical/document/datasheet/DM00108219.pdf, ComponentLink3Description="Package Specification", ComponentLink3URL=http://www.st.com/st-web-ui/static/active/en/resource/technical/document/datasheet/DM00058181.pdf, Data EEPROM="2 KB", DatasheetVersion="Rev. 4", Flash="64 KB", Mounting Technology="Surface Mount", PackageDescription="48-Pin Frame Chip Scale Package, Body 7 x 7 mm, Pitch 0.5 mm", Packing="Tape and Reel", PartNumber=STM32L051C8T6TR, RAM="8 KB", RoHS=TRUE, VDD Max="3.6 V", VDD Min="1.8 V"
U2: library part CMP-22823-000001-1, "CCS811B-JOPR5K LGA10 LF T&R", Max Operating Temperature=50°C, Min Operating Temperature=-5°C, Operating Supply Current=26mA
U3: library part CMP-2000-05073-3, "SENSOR PRESSURE HUMIDITY TEMP", Case/Package=LGA, Max Operating Temperature=85°C, Min Operating Temperature=-40°C, Accuracy=3%, Lead Free="Lead Free", Mount="Surface Mount", Number of Pins=8, Output Type=SPI, Packaging="Cut Tape", Response Time=1s, Sensor Type=Temperature
U4 U5: library part CMP-04917-000286-1, "IC REG LINEAR 3.3V 200MA SOT23-5", RoHS Compliant=Yes
U7: library part CMP-0133-00143-2, "IC CONTROLLR LI-ION 4.2V SOT23-5", Case/Package=SOT-23, Drain to Source Resistance=350mR, Max Charge Current=500mA, Max Input Voltage=6V, Max Operating Temperature=85°C, Max Output Voltage=4.5V, Max Power Dissipation=1.54W, Min Operating Temperature=-40°C, Min Output Voltage=4.168V, Min Supply Voltage=3.75V, Output Voltage=4.2V, Voltage Rating=4.534V, Contact Plating=Tin, Height=0.051inch, Lead Free="Lead Free", Length=0.122inch, Max Supply Voltage=6V, Mount="Surface Mount", Number of Cells=1, Number of Channels=1, Number of Outputs=1, Number of Pins=5, Output Current=500mA, Packaging="Tape and Reel", Radiation Hardening=No, REACH SVHC="No SVHC", Termination=SMD/SMT, Weight=0.00709oz, Width=0.071inch

## Free pads (board coordinates)
  round 1.524 on Top Overlay: 1(100,49)

## Via types
v1: diameter 0.45, hole 0.2, Top Layer to Bottom Layer, 109 vias
v2: diameter 4, hole 3.2, Top Layer to Bottom Layer, 3 vias

## Nets (pads, with @x,y where several pads share a name; then routed paths per layer and width w, separated by ;. In a path a pad name is that pad's centre, name@x,y a point inside that pad or via, vN(x,y) a via of type N, cw(c..) or ccw(c..) an arc to the next point about the centre after c; other vN are vias at no path point)
3.3V_BYPASS: D?.2 P2.5 P3.4 | length 88.6
  Top Layer w0.254: D?.2 86,98.75 v1(86.75,99.5)
  Bottom Layer w0.2: P3.4 97.596,108.864 106.223,108.864 107.721,110.363 113.589,110.363 115.113,108.839 115.113,96.876 120.842,91.146 P2.5
  Bottom Layer w0.254: v1(86.75,99.5) 86.75,104.25 92.5,110 P3.4
3.3V_PERM: C4.1 C9.1 D?.1 L1.2 P1.4 P5.1 P7.1 U1.1 U1.24 U1.36 U1.48 U4.5 | length 140.7
  Top Layer w0.2: 95.606,111.455 107.15,111.455 P5.1 113.792,108.905 115.189,107.508 115.189,103.132 P7.1 ; v1(97.257,78.689) 98.067,79.5 98.317,79.75 102.25,79.75 ; v1(102.75,71.73) U1.24
  Top Layer w0.254: P1.4 84.298,106.443 ccw(c84.118,106.621) 84.372,106.619 cw(c85.4,106.615) 85.396,107.644 ccw(c85.394,107.898) 85.573,107.717 88.567,110.711 cw(c90.363,108.915) 90.363,111.455 95.606,111.455 ; D?.1 87.2,68.05 87.5,67.75 ; v1(87,93.25) 89,91.25 L1.2@89,77.85 ; U4.5 C9.1@89.05,58.075 ; C9.1 89.4,58.425 C9.1@89.05,58.075 ; U1.48 U1.48@97.25,80.3 ; U1.36 102.25,79.75 102,79.5 98.067,79.5 97.75,79.5 97.25,80 U1.48@97.25,80.3 ; 87.5,67.75 87.5,76.35 88.627,77.477 88.777,77.477 89,77.7 L1.2 L1.2@89,77.85 ; 87.5,67.75 87.5,60.4 89.05,58.85 C9.1@89.05,58.075 ; L1.2@89,77.85 89.223,78.073 89.298,78.073 91.2,79.975 C4.1 93.194,79.781 96,79.781 U1.1 96.7,79.75 U1.48@97.25,80.3
  Bottom Layer w0.2: v1(97.257,78.689) 96.774,78.207 96.774,71.526 97.663,70.637 100.406,70.637 101.498,71.73 v1(102.75,71.73)
  Bottom Layer w0.254: P1.4 84.75,103.795 84.75,95.5 v1(87,93.25)
3.3V_SW: C3.1 C5.1 C6.1 C8.1 C11.1 JUMPER4.2 MD1.13 P5.2 R2.2 R3.1 R10.2 U2.6 U3.8 U5.5 | length 184.9
  Top Layer w0.2: U2.6 93.091,101 93.539,101.448 103.861,101.448 ; v1(93.269,95.148) v1@93.275,95.155 ; R2.2 v1@93.275,95.155 ; U3.8@103.875,101 104.092,101.217 ; U3.8 104.115,101 104.115,101.194 104.092,101.217 ; v1(107.798,56.693) 110.541,56.693 111.05,56.184 U5.5 ; v1(109.068,62.027) 109.068,81.28 ; C5.1@110.925,80.9 109.448,80.9 109.068,81.28 ; v1@93.275,95.155 93.275,91.789 94.285,90.78 104.419,90.78 105.486,91.846 ; 103.861,101.448 104.092,101.217 ; 103.861,101.448 104.323,101.448 ; 104.092,101.217 104.323,101.448 ; 104.323,101.448 104.78,101.905 106.604,101.905 107.061,101.448 ; 104.323,101.448 107.061,101.448 ; 105.486,91.846 105.486,84.861 109.068,81.28 ; 105.486,91.846 105.486,95.225 R3.1 104.75,96.012 107.721,98.983 ; 105.486,91.846 107.721,94.082 107.721,98.983 ; 107.061,101.448 107.721,100.787 107.721,98.983
  Top Layer w0.254: JUMPER4.2 73.14,66.794 73.884,87.609 R10.2 81.275,95.075 86.95,100.75 88.35,100.75 C3.1 88.65,100.75 91,100.75 91.25,101 U2.6 ; U3.8@103.875,101 U3.8 ; C11.1 108.575,54.6 108.823,54.848 108.823,54.923 109,55.1 U5.5 ; C5.1@110.925,80.9 C6.1 ; C6.1@113.95,80.85 116.95,80.85 C8.1 MD1.13
  Bottom Layer w0.2: v1(93.269,95.148) 93.269,99.924 95.098,101.752 106.018,101.752 P5.2 ; v1(107.798,56.693) 107.798,60.757 v1(109.068,62.027)
ADC_IN8: P5.3 U1.18 | length 42.1
  Top Layer w0.2: U1.18 v1(99.75,74.68)
  Bottom Layer w0.2: v1(99.75,74.68) 103.073,78.003 103.073,100.076 104.038,101.041 108.776,101.041 P5.3
ANEMOMETER: J3.3 U1.15 | length 28.3
  Top Layer w0.2: v1(98.247,74.168) 98.25,74.165 U1.15
  Bottom Layer w0.2: J3.3 79.858,85.252 92.219,85.252 98.247,79.224 v1(98.247,74.168)
BAT_CHAR_DECT: R8.1 U1.20 | length 4
  Top Layer w0.254: R8.1@100.75,69 U1.20
BME280_CS: U1.31 U3.2 | length 26.6
  Top Layer w0.254: U1.31 v1(105.75,77.25) ; U3.2 107.097,100.35 107.197,100.25 v1(107.25,100.25)
  Bottom Layer w0.254: v1(105.75,77.25) 105.75,78.823 105.979,79.052 105.979,97.229 107.25,98.5 v1(107.25,100.25)
CUSTOM_00: P7.2 U1.28 | length 33
  Top Layer w0.254: U1.28 v1(106,75.75)
  Bottom Layer w0.2: v1(106,75.75) 112.056,75.75 121.987,85.68 121.987,93.405 121.791,93.601 P7.2
CUSTOM_01: P7.3 U1.27 | length 32.1
  Top Layer w0.254: U1.27 v1(106.75,75.25)
  Bottom Layer w0.2: v1(106.75,75.25) 112.182,75.25 123.912,86.981 P7.3
CUSTOM_02: P7.4 U1.26 | length 44.7
  Top Layer w0.254: U1.26 106.62,74.75 106.697,74.673 v1(106.75,74.673)
  Bottom Layer w0.2: v1(106.75,74.673) 113.122,74.673 127,88.551 127,98.196 124.423,100.773 P7.4
CUSTOM_03: P7.5 U1.25 | length 54.3
  Top Layer w0.254: U1.25 106.447,74.25 106.697,74 v1(106.75,74)
  Bottom Layer w0.2: v1(106.75,74) 106.994,74.244 113.233,74.244 127.305,88.316 127.305,100.965 125.984,102.286 121.92,102.286 120.828,101.194 120.828,99.974 122.151,98.652 P7.5
DEBUG_LED: R1.1 U1.33 | length 22.5
  Top Layer w0.2: v1(97.231,77.844) 97.638,78.25 U1.33 ; v1(105.041,72.377) 105.164,72.5 R1.1
  Bottom Layer w0.2: v1(97.231,77.844) 97.231,72.187 98.349,71.069 99.991,71.069 101.299,72.377 v1(105.041,72.377)
DEBUG_RX: P3.3 U1.22 | length 63.1
  Top Layer w0.2: P3.3 111.582,97.418 111.582,90.373 118.059,83.896 v1(118.059,76.149) ; v1(101.344,70.739) 101.75,71.145 U1.22
  Bottom Layer w0.2: v1(101.344,70.739) 112.649,70.739 v1(118.059,76.149)
DEBUG_TX: P3.2 U1.21 | length 61.3
  Top Layer w0.2: v1(101.244,74.168) 101.25,74.162 U1.21 ; P3.2 120.066,91.474 120.066,89.56 119.837,89.332 119.837,79.07 v1(119.814,79.047)
  Bottom Layer w0.2: v1(101.244,74.168) 102.166,73.246 114.013,73.246 v1(119.814,79.047)
GND: C1.2 C2.2 C3.2 C4.2 C5.2 C6.2 C8.2 C9.2 C10.2 C11.2 C12.2 C15.2 C16.2 C17.2 D1.1 J1.2 J2.2 J3.1 J3.6 J4.2 J4.6 J5.2 J5.3 J5.4 J5.5 MD1.1 MD1.8 MD1.10 P1.1 P2.1 P3.1 P5.4 P7.6 R4.2 R5.2 R6.1 R9.2 R?.1 U1.8 U1.23 U1.35 U1.47 U2.1 U2.11 U3.1 U3.7 U4.2 U5.2 U7.2 | length 11.9
  Top Layer w0.2: U1.23 102.25,71.5 D1.1
  Top Layer w0.254: v1(99.75,100.25) 99.803,100.25 100.178,100.625 C15.2 ; U1.35 v1(105.5,79.25) ; 108.5,52 C11.2 ; v1(110,61.25) 110.75,61.25 MD1.1 ; 112,51.5 U5.2
  other v1: 84.25,53.75 79.887,62.967 126.5,74 127,74 127.5,74 128,74 128.5,74 129,74 129.5,74 130,74 130.5,74 131,74 131.5,74 126.5,74.5 127,74.5 127.5,74.5 128,74.5 128.5,74.5 129,74.5 129.5,74.5 130,74.5 130.5,74.5 131,74.5 131.5,74.5 126.5,79 127,79 127.5,79 128,79 128.5,79 129,79 129.5,79 130,79 130.5,79 131,79 131.5,79 126.5,79.5 127,79.5 127.5,79.5 128,79.5 128.5,79.5 129,79.5 129.5,79.5 130,79.5 130.5,79.5 131,79.5 131.5,79.5 108.5,83.5 111.75,83.75 109,91.25 109,97 88,97.5 102.25,97.75
I2C1_SCL: P1.2 U1.42 U2.10 U3.4 | length 71.3
  Top Layer w0.254: v1(99.5,90) 92,90 91,91 91,98.451 91.149,98.6 U2.10 93.1,98.6 93.173,98.527 93.173,97.327 93.5,97 103.875,97 105.925,99.05 U3.4 ; U1.42 v1(100.25,83.5)
  Bottom Layer w0.254: P1.2 87.6,105.85 86,104.25 86,96.149 92.149,90 v1(99.5,90) 100.25,89.25 v1(100.25,83.5)
I2C1_SDA: P1.3 U1.43 U2.9 U3.3 | length 92
  Top Layer w0.2: U2.9 90.945,99.2 90.5,98.755 90.5,90.881 92.177,89.205 v1(104.597,89.205) ; v1(104.597,98.857) 105.44,99.7 U3.3
  Top Layer w0.254: U2.9 90.7,99.2 90.5,99 90.5,90.75 91.75,89.5 v1(98.5,89.5) ; U1.43 v1(99.75,82.75)
  Bottom Layer w0.2: v1(104.597,89.205) v1(104.597,98.857)
  Bottom Layer w0.254: P1.3 85.4,95.85 91.75,89.5 v1(98.5,89.5) 99.25,89.5 99.75,89 v1(99.75,82.75)
INT_CSS: U1.41 U2.3 | length 24.5
  Top Layer w0.254: U2.3 95.225,99.775 96.225,99.775 v1(96.5,99.5) ; U1.41 v1(100.75,83)
  Bottom Layer w0.254: v1(96.5,99.5) 96.5,92.75 97.25,92 97.5,91.75 100.497,91.75 102.145,90.102 102.145,84.395 v1(100.75,83)
LIGHT_NV: U1.19
NetC1_1: C1.1 C2.1 L1.1 U1.9 | length 8.4
  Top Layer w0.254: L1.1 89.175,76.4 C2.1 91.41,76.4 92.507,75.303 ; C1.1 92.507,75.303 ; U1.9 92.953,75.75 92.507,75.303
NetC15_1: C15.1 U3.6 | length 2.9
  Top Layer w0.254: C15.1 102.524,99.425 102.799,99.7 U3.6
NetC16_1: C16.1 D3.1 D4.2 U7.4 | length 20.4
  Top Layer w0.2: U7.4 92.472,49.722 D4.2
  Top Layer w0.25: C16.1@79.5,50.917 cw(c80.394,48.539) 82.19,50.335 U7.4
  Top Layer w0.5: D4.2 94.75,52 D3.1
NetD1_2: D1.2 R1.2 | length 3.1
  Top Layer w0.2: R1.2 105.994,71.05 105.994,71.525 106,71.525 ; D1.2 D1.2@106.25,69.368
  Top Layer w0.254: 106,71.525 106.25,71.275 D1.2@106.25,69.368
NetD4_1: D4.1 R7.2 | length 6.3
  Top Layer w0.2: R7.2 v1(91,45.585) ; v1(93.497,48.082) 93.497,49.247 D4.1
  Bottom Layer w0.2: v1(91,45.585) v1(93.497,48.082)
NetE1_1: E1.1 J5.1 MD1.9 | length 9
  Top Layer w1: MD1.9 E1.1 J5.1
NetJ4_5: J4.5 JUMPER4.1 | length 4.6
  Top Layer w0.254: JUMPER4.1 J4.5
NetP6_1: P6.1 R5.1 U5.3 | length 18.6
  Top Layer w0.2: U5.3 112.95,53.739 ; v1(112.954,53.975) 112.95,53.971 112.95,53.739 ; R5.1 114.436,55.225 112.95,53.739
  Bottom Layer w0.2: P6.1 107.793,48.814 v1(112.954,53.975)
NetR3_2: R3.2 R?.2 | length 7.8
  Top Layer w0.254: R?.2 98.46,93.54 99,93 103.975,93 R3.2
NetR6_2: R6.2 U7.5 | length 6.6
  Top Layer w0.254: R6.2 76.694,51.118 78.272,49.54 ; U7.5 79.09,48.722 78.272,49.54 ; 78.27,49.542 cw(c78.092,49.36) 78.271,49.54 ; 78.27,49.542 cw(c78.092,49.36) 78.271,49.54 ; 78.27,49.542 cw(c78.092,49.36) 78.271,49.54 ; 78.27,49.542 cw(c78.092,49.36) 78.271,49.54
NetR7_1: R7.1 R8.2 U7.1 | length 40.5
  Top Layer w0.2: U7.1@84.361,47.014 v1(85.979,47.014) ; v1(102.21,69.875) 102.21,69 R8.2
  Top Layer w0.25: U7.1 87.109,44.019 R7.1
  Top Layer w0.254: U7.1 U7.1@84.361,47.014
  Bottom Layer w0.2: v1(85.979,47.014) 85.979,53.645 v1(102.21,69.875)
NetR9_1: R9.1 U1.44 | length 4.1
  Top Layer w0.254: R9.1 99.25,84.75 U1.44
NRESET: MD1.6 P2.4 U1.7 U1.29 | length 75
  Top Layer w0.2: v1(121,59.442) MD1.6
  Top Layer w0.254: U1.7 99.746,76.75 100.246,76.25 U1.29 v1(106.5,76.25)
  Bottom Layer w0.2: 106.948,76.733 106.07,76.733 105.537,76.2 105.537,74.31 106.299,73.548 113.401,73.548 120.103,80.25 120.883,80.25 121,80.133 v1(121,59.442)
  Bottom Layer w0.254: v1(106.5,76.25) 106.503,76.25 106.967,76.714 119.046,88.793 P2.4
POWER_EN: R4.1 U1.10 U4.3 | length 27.7
  Top Layer w0.254: U4.3 U4.3@90.95,54.128 ; R4.1 91.097,54.275 U4.3@90.95,54.128 ; U1.10 94,75.25 93.75,75 93.75,57.706 91.163,55.119 91.099,55.119 90.95,54.97 U4.3@90.95,54.128
RESET_CSS: R2.1 U1.45 U2.2 | length 26.9
  Top Layer w0.254: v1(94.75,91.5) 94.75,95.975 R2.1 95.5,96 v1(96,96.5) ; U2.2 95.226,99.175 95.705,99.175 96,98.88 v1(96,97.5) ; U1.45 98.75,83.5 98.321,83.929 98.321,87.071 99,87.75 v1(100.75,87.75)
  Bottom Layer w0.254: v1(94.75,91.5) 95.5,90.75 99.75,90.75 100.75,89.75 v1(100.75,87.75) ; v1(96,96.5) v1(96,97.5)
RFM_D0: MD1.14 U1.12 | length 39.7
  Top Layer w0.2: v1(95.199,70.18) 95.199,74.25 U1.12 ; v1(109.728,67.335) 109.728,78.486 110.896,79.654 114.187,79.654 115,78.842 MD1.14
  Bottom Layer w0.2: v1(95.199,70.18) 101.752,70.18 101.905,70.333 103.2,70.333 106.197,67.335 v1(109.728,67.335)
RFM_D5: MD1.7 U1.13 | length 38.9
  Top Layer w0.2: U1.13 97.25,67.266 107.086,57.429 121.92,57.429 123,58.509 MD1.7
SENSE_CSS: U1.11 U2.4 U2.5 | length 36.4
  Top Layer w0.254: U2.5 U2.4 96.797,100.4 96.947,100.25 v1(97,100.25) ; U1.11 v1(98.75,74.75)
  Bottom Layer w0.254: v1(97,100.25) 97,93 97.894,92.106 100.644,92.106 102.729,90.021 102.729,78.729 v1(98.75,74.75)
SPI1_MISO: MD1.2 U1.32 | length 29.4
  Top Layer w0.254: U1.32 106.747,77.75 107.5,76.997 107.5,70.123 107.629,69.995 107.629,69.005 107.5,68.877 107.5,60.5 109.5,58.5 112.5,58.5 113,59 MD1.2
SPI1_MOSI: MD1.3 U1.17 | length 30.8
  Top Layer w0.254: U1.17 99.25,69 100.5,67.75 105.25,67.75 106.75,66.25 106.75,60.25 109,58 114.25,58 115,58.75 MD1.3
SPI1_NSS: MD1.5 U1.38 | length 42.9
  Top Layer w0.254: U1.38 v1(102.25,82.5) 105.5,82.5 108,80 108,60.75 v1(108.25,60.5) ; v1(119,59) MD1.5
  Bottom Layer w0.254: v1(108.25,60.5) 110.75,58 118.601,58 118.995,58.394 118.995,58.995 v1(119,59)
SPI1_SCK: MD1.4 U1.39 | length 43
  Top Layer w0.254: U1.39 v1(101.75,83.25) 105.5,83.25 108.5,80.25 108.5,61.027 v1(108.763,60.763) ; MD1.4@116.627,63.123 117,62.75 MD1.4 v1(117,59)
  Bottom Layer w0.254: v1(108.763,60.763) 110.527,59 v1(117,59)
SYS_SWCLK: P2.2 U1.37 | length 25.9
  Top Layer w0.254: U1.37 105.2,81.05 v1(106.75,79.5) ; P2.2@114.739,93.788 115.196,93.788 P2.2
  Bottom Layer w0.254: v1(106.75,79.5) 108.658,79.5 116.75,87.592 116.75,91.318 116.676,91.392 116.661,91.407 cw(c117.25,92.25) 116.435,92.878 116.435,93.065 P2.2
SYS_SWDIO: P2.3 U1.34 | length 21.6
  Top Layer w0.254: U1.34 105.569,78.75 105.622,78.698 v1(106.302,78.698)
  Bottom Layer w0.254: v1(106.302,78.698) 106.34,78.735 108.485,78.735 117.25,87.5 P2.3
V_BAT: C12.1 C17.1 J1.1 P6.2 U5.1 U7.3 | length 38.9
  Top Layer w0.254: 97,47.064 97,47.084
  Top Layer w0.5: U7.3@85.481,48.736 cw(c85.481,46.196) 87.277,47.992 C17.1 97,47.064 J1.1 ; 97,47.084 P6.2 100,50.084 100,53 100.5,53.5 102,53.5 105.5,50 C12.1 111.4,50.075 111.05,50.425 U5.1
V_SOLAR: D3.2 J2.1 | length 10
  Top Layer w0.5: D3.2 101.49,52 105.174,48.316 J2.1
VBAT: C10.1 U4.1 | length 3.8
  Top Layer w0.254: C10.1 87.07,55.6 88.532,54.138 88.891,54.138 89.05,53.979 U4.1
WAKE_CSS: U1.40 U2.7 | length 31.6
  Top Layer w0.254: U2.7 91.222,100.4 90,99.178 90,90.5 91.979,88.521 101.101,88.521 101.25,88.372 U1.40
WATER_METER: J4.3 J4.4 U1.14 | length 23.6
  Top Layer w0.2: v1(97.75,68.67) U1.14
  Top Layer w0.254: J4.3 J4.4
  Bottom Layer w0.2: J4.4 v1(97.75,68.67)
"WIND VANE": J3.4 R10.1 U1.16 | length 46.5
  Top Layer w0.2: 81.982,92.482 82.141,92.482 82.725,93.066 82.725,94.277 R10.1 ; v1(98.75,71.73) U1.16
  Top Layer w0.254: J3.4 79.506,84 79.432,84.074 78.293,85.213 78.263,85.243 cw(c78.395,85.461) 78.23,85.267 cw(c81.265,88.774) 76.888,87.239 76.888,87.283 76.888,87.388 76.963,87.463 81.981,92.482 ccw(c80.185,94.277) R10.1@82.628,94.972
  Bottom Layer w0.2: J3.4 85.418,79.582 97.286,79.582 97.714,79.154 97.714,72.766 v1(98.75,71.73)
pads on no net: J3. J3.2 J3.5 J4. J4.1 MD1.11 MD1.12 MD1.15 MD1.16 P7.MH1 P7.MH2 U1.2 U1.3 U1.4 U1.5 U1.6 U1.30 U1.46 U2.8 U3.5 U4.4 U5.4
copper on no net: | length 700.6
  Top Layer w0.254: 140,77 ccw(c100,77) 140,77
  Top Layer w2: 137.671,66.906 cw(c100,77) 137.671,87.094
  Bottom Layer w2: 137.671,66.906 cw(c100,77) 137.671,87.094
  other v2: 100,56 68,77 100,105.5

## Polygon pours and split planes (outlines as drawn)
GND on Top Layer "GND_L01_P003" (hatched 45Degree grid 0.5 track 0.3, pour order 3): 63.958,76.74 ccw(c99.958,76.74) 99.958,40.74 ccw(c99.958,76.74) 135.958,76.74 ccw(c99.958,76.74) 99.958,112.74 ccw(c99.958,76.74)
GND on Bottom Layer "GND_L02_P004" (hatched 45Degree grid 0.5 track 0.3, pour order 4): 63.924,76.802 ccw(c99.924,76.802) 99.924,40.802 ccw(c99.924,76.802) 135.924,76.802 ccw(c99.924,76.802) 99.924,112.802 ccw(c99.924,76.802)

## Keep-outs
Top Layer:
  region: 110,75 126,75 126,62 110,62
  region: 141.5,78.5 126,78.5 126,75 141.5,75

## Silkscreen, mask and mechanical layers (free items; w line width, h text height)
Top Overlay:
  circle w2: c99.946,76.711 r37
  circle w2: c100.032,77.024 r37
  circle w0.254: c100,77 r40
Bottom Overlay:
  circle w2: c100,77 r37
Mechanical 13:
  circle w0.254: c80.046,58.068 r3

## Text inside footprints (layer, text, board x,y; h text height)
P2: Bottom Overlay "1" at 112.371,94.725 h1.02 r135; Bottom Overlay "5" at 119.371,87.725 h1.02 r135